# Allegro board usm_rev_p1.brd
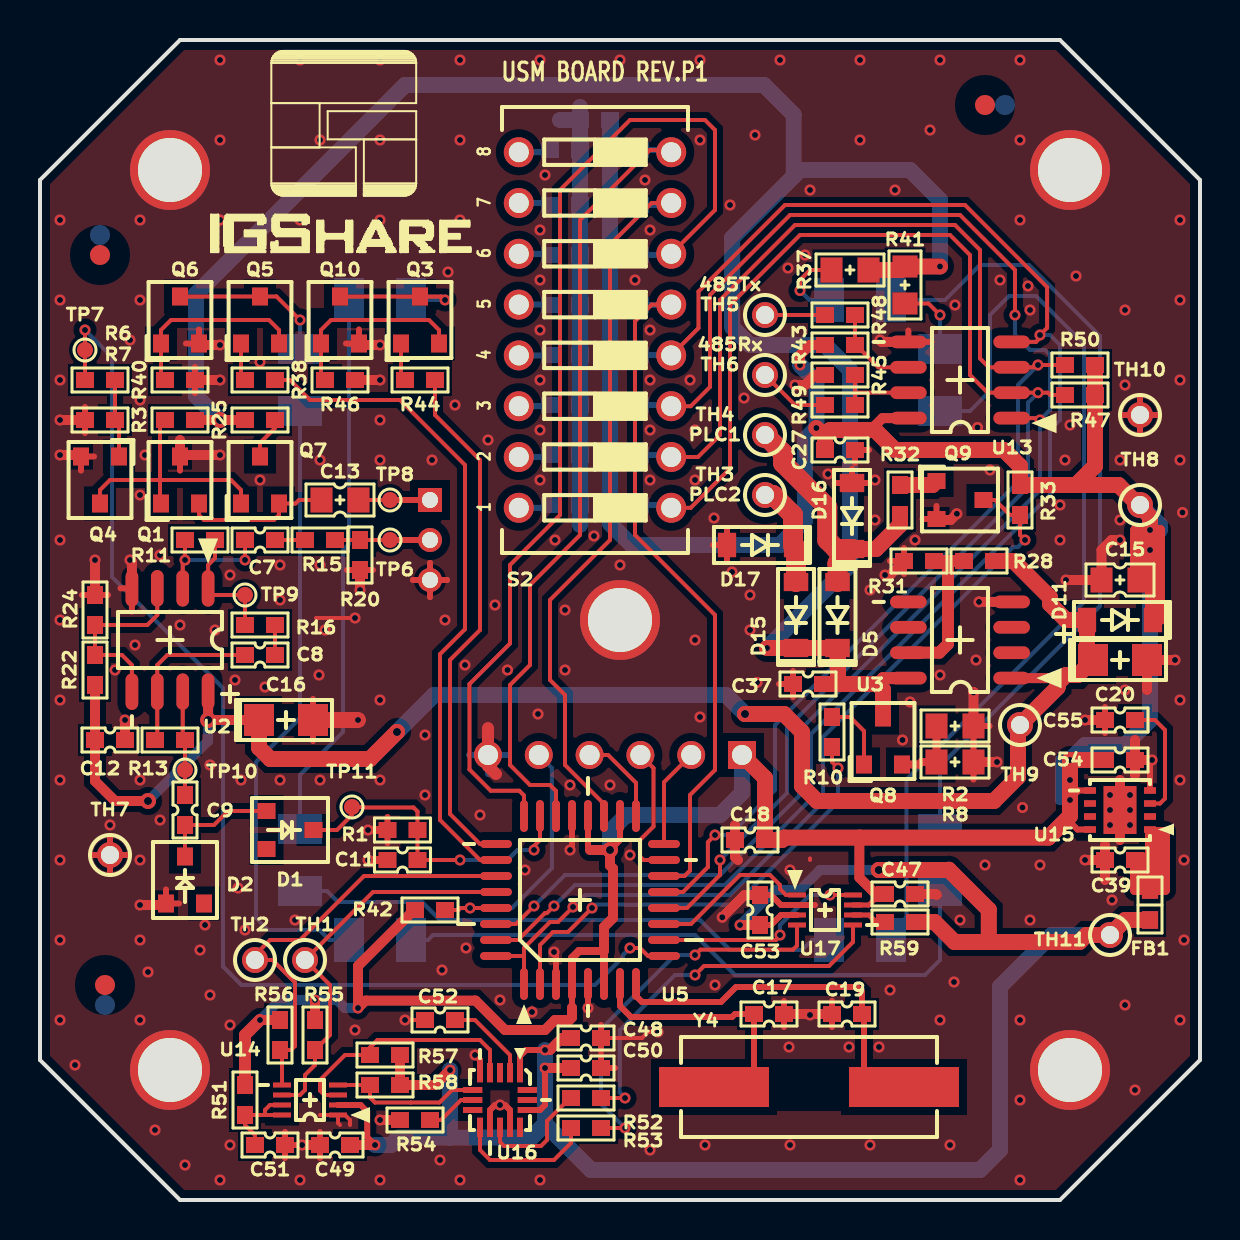
[diagram p0: board, top side]
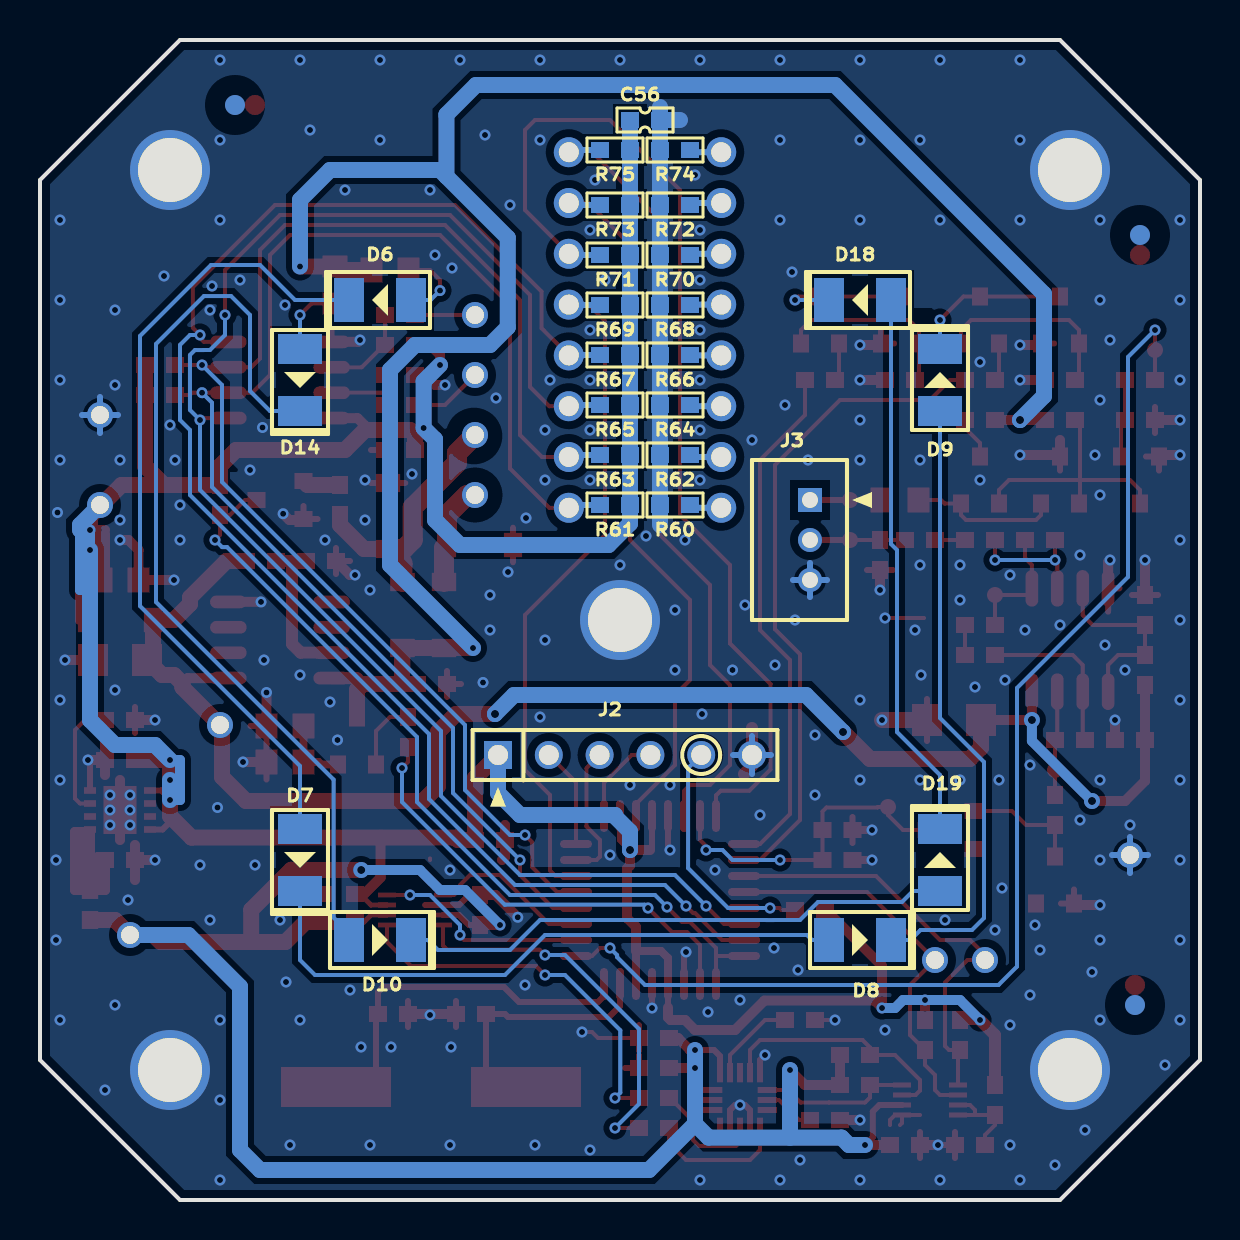
[diagram p1: board, bottom side, seen from below]

Outline 58 x 58 mm; copper layers: TOP, BOTTOM. Coordinates in mm from the lower left corner of the outline.
Outline path: 0,51 7,58 51,58 58,51 58,7 51,0 7,0 0,7 0,51

## Placement (name value [footprint] x y rotation side)
C7  200pF  [CC1608]  11 33 0 top
C8  680pF  [CC1608]  11 27.25 0 top
C9  1nF  [CC1608]  7.25 19.5 90 top
C11  560pF  [CC1608]  18.12 17 0 top
C12  100nF  [CC1608]  3.5 23 180 top
C13  47nF  [CC2012]  15 35 180 top
C15  2.2uF  [CC2012]  54 31 0 top
C16  TCSCS1C685MAAR  [TC3216]  12.3 24 0 top
C17  15pF  [CC1608]  36.45 9.3 0 top
C18  100nF  [CC1608]  35.5 18 0 top
C19  15pF  [CC1608]  40.35 9.3 180 top
C20  TCSCS1C685MAAR  [TC3216]  54 27 0 top
C27  100nF  [CC1608]  40 37.5 180 top
C37  680nF  [CC1608]  38.4 25.8 0 top
C39  2.2uF  [CC1608]  54 17 180 top
C47  100nF  [CC1608]  43 15.3 0 top
C48  100nF  [CC1608]  27.3 8.1 0 top
C49  100nF  [CC1608]  14.75 2.75 180 top
C50  4.7uF  [CC1608]  27.3 6.6 0 top
C51  2.2uF  [CC1608]  11.5 2.75 0 top
C52  100nF  [CC1608]  20 9 180 top
C53  100nF  [CC1608]  36 14.5 90 top
C54  100nF  [CC1608]  54 22 0 top
C55  100nF  [CC1608]  54 24 180 top
C56  100nF  [CC1608]  27.75 54 0 bottom
D1  -  [BAT54]  12.5 18.5 270 top
D2  -  [BAT54]  7.25 16 0 top
D5  MMSD4148T1G  [SOD-123]  39.88 29.25 270 top
D6  JSL_3528URC  [JSL-3528_ALT]  41 45 0 bottom
D7  JSL_3528URC  [JSL-3528_ALT]  45 17 270 bottom
D8  JSL_3528URC  [JSL-3528_ALT]  17 13 180 bottom
D9  JSL_3528URC  [JSL-3528_ALT]  13 41 90 bottom
D10  JSL_3528PGC  [JSL-3528_ALT]  41 13 180 bottom
D11  MMSD4148T1G  [SOD-123]  54 29 0 top
D14  JSL_3528PGC  [JSL-3528_ALT]  45 41 270 bottom
D15  MMSD4148T1G  [SOD-123]  37.8 29.25 270 top
D16  MMSD4148T1G  [SOD-123]  40.6 34.2 270 top
D17  MMSD4148T1G  [SOD-123]  36 32.75 0 top
D18  JSL_3528PGC  [JSL-3528_ALT]  17 45 0 bottom
D19  JSL_3528PGC  [JSL-3528_ALT]  13 17 90 bottom
FB1  BLM18HE152SN1  [BEAD1608]  55.5 14.75 270 top
H1  PCB_HOLE  [HOLE3_2]  6.5 51.5 0 top
H2  PCB_HOLE  [HOLE3_2]  51.5 51.5 0 top
H3  PCB_HOLE  [HOLE3_2]  6.5 6.5 0 top
H4  PCB_HOLE  [HOLE3_2]  51.5 6.5 0 top
H5  PCB_HOLE  [HOLE3_2]  29 29 0 top
J2  PH01(2.54)-SS40P-11.5MM  [HEADER6_2_5MM_S]  28.75 22.25 180 bottom
J3  -  [A2001-WV03]  19.5 33 90 bottom
NOREF  -  []  0 7 0 top
NOREF#2  -  []  72 -25.8 0 top
NOREF#3  -  []  7 0 90 top
NOREF#4  -  [unnamed#2]  47.25 54.75 0 top
NOREF#5  -  []  0 0 0 top
NOREF#6  -  [unnamed#2]  3 47.25 0 top
NOREF#7  -  []  80.6 -2.2 0 top
NOREF#8  -  [unnamed#2]  3.25 10.75 0 top
NOREF#9  -  [unnamed#2]  3 48.25 180 bottom
NOREF#10  -  [unnamed#2]  3.25 9.75 180 bottom
NOREF#11  -  [unnamed#2]  48.25 54.75 180 bottom
Q1  MMBT3906  [SOT23]  7 36 0 top
Q3  MMBT3904  [SOT23]  19 44 0 top
Q4  MMBT3904  [SOT23]  3 36 180 top
Q5  MMBT3904  [SOT23]  11 44 0 top
Q6  MMBT3904  [SOT23]  7 44 0 top
Q7  MMBT3904  [SOT23]  11 36 0 top
Q8  ZXTN04120HFF_SOT23F  [SOT23]  42.15 22.95 0 top
Q9  MMBT3904  [SOT23]  46 35 270 top
Q10  MMBT3904  [SOT23]  15 44 0 top
R1  510K  [RC1608]  18.12 18.5 0 top
R2  15  [RC2012]  45.75 23.7 180 top
R3  47K  [RC1608]  7 39 0 top
R6  10K  [RC1608]  3 41 0 top
R7  10K  [RC1608]  3 39 0 top
R8  15  [RC2012]  45.75 21.9 180 top
R10  1K  [RC1608]  39.6 23.4 270 top
R11  1M  [RC1608]  8 33 0 top
R13  1M  [RC1608]  6.5 23 0 top
R15  10K  [RC1608]  14 33 180 top
R16  10K  [RC1608]  11 28.75 0 top
R20  100K  [RC1608]  16 32.25 90 top
R22  10K  [RC1608]  2.75 26.5 90 top
R24  10K  [RC1608]  2.75 29.5 270 top
R25  200  [RC1608]  11 39 180 top
R28  360K  [RC1608]  46.95 31.95 0 top
R31  100K  [RC1608]  43.95 31.95 0 top
R32  100K  [RC1608]  43 35 90 top
R33  47K  [RC1608]  49 35 90 top
R37  1K  [RC2012]  40.5 46.5 0 top
R38  2.7K  [RC1608]  11 41 180 top
R40  3K  [RC1608]  7 41 180 top
R41  1K  [RC2012]  43.25 45.75 90 top
R42  10K  [RC1608]  19.5 14.5 180 top
R43  4.7K  [RC1608]  40 42.75 180 top
R44  2.7K  [RC1608]  19 41 180 top
R45  4.7K  [RC1608]  40 41.25 0 top
R46  3K  [RC1608]  15 41 180 top
R47  4.7K  [RC1608]  52 40.25 0 top
R48  10  [RC1608]  40 44.25 0 top
R49  10  [RC1608]  40 39.75 0 top
R50  4.7K  [RC1608]  52 41.75 0 top
R51  200K  [RC1608]  10.25 5 90 top
R52  0  [RC1608]  27.3 5.1 180 top
R53  0  [RC1608]  27.3 3.6 180 top
R54  4.7K  [RC1608]  18.75 4 0 top
R55  4.7K  [RC1608]  13.75 8.25 90 top
R56  4.7K  [RC1608]  12 8.25 90 top
R57  4.7K  [RC1608]  17.25 7.25 0 top
R58  4.7K  [RC1608]  17.25 5.75 0 top
R59  4.7K  [RC1608]  43 13.9 0 top
R60  1K  [RC1608]  26.25 34.75 180 bottom
R61  4.7K  [RC1608]  29.25 34.75 180 bottom
R62  1K  [RC1608]  26.25 37.25 180 bottom
R63  4.7K  [RC1608]  29.25 37.25 180 bottom
R64  1K  [RC1608]  26.25 39.75 180 bottom
R65  4.7K  [RC1608]  29.25 39.75 180 bottom
R66  1K  [RC1608]  26.25 42.25 180 bottom
R67  4.7K  [RC1608]  29.25 42.25 180 bottom
R68  1K  [RC1608]  26.25 44.75 180 bottom
R69  4.7K  [RC1608]  29.25 44.75 180 bottom
R70  1K  [RC1608]  26.25 47.25 180 bottom
R71  4.7K  [RC1608]  29.25 47.25 180 bottom
R72  1K  [RC1608]  26.25 49.75 180 bottom
R73  4.7K  [RC1608]  29.25 49.75 180 bottom
R74  1K  [RC1608]  26.25 52.5 180 bottom
R75  4.7K  [RC1608]  29.25 52.5 180 bottom
S2  -  [LL1051-1-8]  27.75 43.5 90 top
TH1  TH  [1PIN-HDR]  13.25 12 0 top
TH2  TH  [1PIN-HDR]  10.75 12 0 top
TH3  TH  [1PIN-HDR]  36.25 35.25 0 top
TH4  TH  [1PIN-HDR]  36.25 38.25 0 top
TH5  TH  [1PIN-HDR]  36.25 44.25 0 top
TH6  TH  [1PIN-HDR]  36.25 41.25 0 top
TH7  GND  [1PIN-HDR]  3.5 17.25 0 top
TH8  D4.9V  [1PIN-HDR]  55 34.75 0 top
TH9  A5.5V  [1PIN-HDR]  49 23.75 0 top
TH10  GND  [1PIN-HDR]  55 39.25 0 top
TH11  D3V3P  [1PIN-HDR]  53.5 13.25 0 top
TP6  B+  [TP]  17.5 33 0 top
TP7  B+  [TP]  2.25 42.5 0 top
TP8  B+  [TP]  17.5 35 0 top
TP9  B+  [TP]  10.25 30.25 0 top
TP10  B+  [TP]  7.25 21.5 0 top
TP11  B+  [TP]  15.6 19.65 0 top
U2  TL072ID  [SOP8_3_9_6_1_27]  6.5 28 180 top
U3  LP2951D  [SOP8_3_9_6_1_27]  46 28 90 top
U5  ATMEGA48V-10AU  [QFP32_7_9_0_8]  27 15 90 top
U13  SN65176BD/DNI  [SOP8_3_9_6_1_27]  46 41 90 top
U14  PCA9306_VSSOP  [TSSOP8_2_3_3_1_0_5]  13.5 5 90 top
U15  TPS73533QDRBRQ1  [QFN8_3_0_65]  54 19.5 90 top
U16  MMA8451Q  [QFN16_3_0_5]  23 5 270 top
U17  TXS0102-Q1  [TSSOP8_2_3_3_1_0_5]  39.25 14.5 270 top
Y4  SX-1(8MHz)  [SX-1]  38.45 5.65 0 top

## Library data of the parts
C7-C9 C11 C12 C17-C19 C27 C37 C39 C47-C56 = _CC1608
C13 C15 = _CC2012
C16 C20 = _TC3216
D1 D2 = _BAT54
D5 D11 D15-D17 = _SOD-123
D6-D10 D14 D18 D19 = _JSL-3528_ALT
FB1 = _BEAD1608
H1-H5 = _HOLE3_2
J2 = _HEADER6_2_5MM_S
J3 = _A2001-WV03
Q1 Q3-Q10 = _SOT23
R1 R3 R6 R7 R10 R11 R13 R15 R16 R20 R22 R24 R25 R28 R31-R33 R38 R40 R42-R75 = _RC1608
R2 R8 R37 R41 = _RC2012
S2 = _LL1051-1-8
TH1-TH11 = _1PIN-HDR
TP6-TP11 = _TP
U2 U3 U13 = _SOP8_3_9_6_1_27
U5 = _QFP32_7_9_0_8
U14 U17 = _TSSOP8_2_3_3_1_0_5
U15 = _QFN8_3_0_65
U16 = _QFN16_3_0_5
Y4 = _SX-1

## Footprints (pads in the part's own frame, mm; a bottom-side part is the same pattern mirrored in y, then rotated)
1PIN-HDR
  round 1.3 hole 0.9: 1(0,0)
A2001-WV03
  rect 1.2x1.2 hole 0.8: 1(2,0)
  round 1.2 hole 0.8: 2(0,0) 3(-2,0)
BAT54
  rect 0.8x0.9 smd: 1(0,1.175) 2(-0.95,-1.175) 3(0.95,-1.175)
BEAD1608
  rect 0.889x0.813 smd: 1(-0.75,0) 2(0.75,0)
CC1608
  rect 0.9x0.8 smd: 1(-0.75,0) 2(0.75,0)
CC2012
  rect 1.1x1.25 smd: 1(-0.925,0) 2(0.925,0)
HEADER6_2_5MM_S
  rect 1.4x1.4 hole 1: 1(-6.35,0)
  round 1.4 hole 1: 2(-3.81,0) 3(-1.27,0) 4(1.27,0) 5(3.81,0) 6(6.35,0)
HOLE3_2
  round 4 hole 3.2: 1(0,0)
JSL-3528_ALT
  rect 1.5x2.2 smd: 1(-1.55,0) 2(1.55,0)
LL1051-1-8
  round 1.499 hole 1: 1(-8.89,3.81) 2(-6.35,3.81) 3(-3.81,3.81) 4(-1.27,3.81) 5(1.27,3.81) 6(3.81,3.81) 7(6.35,3.81) 8(8.89,3.81) 9(8.89,-3.81) 10(6.35,-3.81) 11(3.81,-3.81) 12(1.27,-3.81) 13(-1.27,-3.81) 14(-3.81,-3.81) 15(-6.35,-3.81) 16(-8.89,-3.81)
QFN8_3_0_65
  rect 0.325x0.6 smd: 1(-0.975,-1.5) 2(-0.325,-1.5) 3(0.325,-1.5) 4(0.975,-1.5) 5(0.975,1.5) 6(0.325,1.5) 7(-0.325,1.5) 8(-0.975,1.5)
  rect 2.4x1.65 smd: 9(0,0)
QFN16_3_0_5
  rect 0.967x0.3 smd: 1(-1.367,1) 2(-1.367,0.5) 3(-1.367,0) 4(-1.367,-0.5) 5(-1.367,-1) 9(1.367,-1) 10(1.367,-0.5) 11(1.367,0) 12(1.367,0.5) 13(1.367,1)
  rect 0.3x0.967 smd: 6(-0.5,-1.367) 7(0,-1.367) 8(0.5,-1.367) 14(0.5,1.367) 15(0,1.367) 16(-0.5,1.367)
QFP32_7_9_0_8
  oval 1.6x0.4 smd: 1(-4.2,2.8) 2(-4.2,2) 3(-4.2,1.2) 4(-4.2,0.4) 5(-4.2,-0.4) 6(-4.2,-1.2) 7(-4.2,-2) 8(-4.2,-2.8) 17(4.2,-2.8) 18(4.2,-2) 19(4.2,-1.2) 20(4.2,-0.4) 21(4.2,0.4) 22(4.2,1.2) 23(4.2,2) 24(4.2,2.8)
  oval 0.4x1.6 smd: 9(-2.8,-4.2) 10(-2,-4.2) 11(-1.2,-4.2) 12(-0.4,-4.2) 13(0.4,-4.2) 14(1.2,-4.2) 15(2,-4.2) 16(2.8,-4.2) 25(2.8,4.2) 26(2,4.2) 27(1.2,4.2) 28(0.4,4.2) 29(-0.4,4.2) 30(-1.2,4.2) 31(-2,4.2) 32(-2.8,4.2)
RC1608
  rect 0.9x0.8 smd: 1(-0.75,0) 2(0.75,0)
RC2012
  rect 1.1x1.25 smd: 1(-0.925,0) 2(0.925,0)
SOD-123
  rect 0.91x1.22 smd: 1(1.65,0) 2(-1.65,0)
SOP8_3_9_6_1_27
  oval 0.635x1.829 smd: 1(-1.905,-2.583) 2(-0.635,-2.583) 3(0.635,-2.583) 4(1.905,-2.583) 5(1.905,2.583) 6(0.635,2.583) 7(-0.635,2.583) 8(-1.905,2.583)
SOT23
  rect 0.8x0.9 smd: 1(-0.95,-1.175) 2(0.95,-1.175) 3(0,1.175)
SX-1
  rect 5.5x2 smd: 1(-4.75,0) 2(4.75,0)
TC3216
  rect 1.5x1.6 smd: 1(-1.35,0) 2(1.35,0)
TP
  round 0.8 smd: 1(0,0)
TSSOP8_2_3_3_1_0_5
  rect 0.25x0.9 smd: 1(-0.75,-1.4) 2(-0.25,-1.4) 3(0.25,-1.4) 4(0.75,-1.4) 5(0.75,1.4) 6(0.25,1.4) 7(-0.25,1.4) 8(-0.75,1.4)
unnamed#2
  round 1 smd: (0,0)

## Nets
A5.5V: C12.2 C16.1 C20.1 D11.2 R22.1 R28.2 TH9.1 U2.8 U3.1
A24V: C37.2 D5.1 D15.1 Q8.3 R3.2 R25.2 R37.2 R41.2 U3.8
D3V3P: C48.1 C49.1 C50.1 C53.1 FB1.2 R57.2 R58.2 R59.2 TH11.1 U14.2 U16.1 U16.14 U17.3
D4.9V: C15.2 C18.2 C27.2 C47.1 C54.1 C56.2 D11.1 J2.1 R33.2 R42.2 R43.2 R47.2 R50.2 R51.2 R55.2 R56.2 R61.2 R63.2 R65.2 R67.2 R69.2 R71.2 R73.2 R75.2 TH8.1 U5.4 U5.6 U5.18 U5.20 U13.8 U15.5 U15.8 U17.7
GND: C11.1 C12.1 C15.1 C16.2 C17.2 C18.1 C19.2 C20.2 C27.1 C37.1 C39.2 C47.2 C48.2 C49.2 C50.2 C51.2 C52.2 C53.2 C54.2 C55.2 C56.1 D2.2 D16.2 D17.2 H1.1 H2.1 H3.1 H4.1 H5.1 J2.6 J3.3 Q1.3 Q4.2 Q6.2 Q9.2 Q10.2 R1.1 R2.1 R7.1 R8.1 R20.1 R24.1 R31.1 R40.1 R45.1 R46.1 R54.1 R60.1 R62.1 R64.1 R66.1 R68.1 R70.1 R72.1 R74.1 TH7.1 TH10.1 U2.4 U3.4 U5.3 U5.5 U5.21 U13.5 U14.1 U15.4 U15.9 U16.5 U16.10 U16.12 U17.2
485_DE_EN: R50.1 R63.1 S2.15 U5.13 U13.3
485_RE_EN: R47.1 R61.1 S2.16 U5.12 U13.2
485_RX: R49.1 TH6.1
485_RXD: R65.1 S2.14 U5.30 U13.1
485_TX: R48.1 TH5.1
485_TXD: R67.1 S2.13 U5.31 U13.4
I2C_SCL: R55.1 TH1.1 U5.28 U14.6
I2C_SDA: R56.1 TH2.1 U5.27 U14.5
INT1: R52.1 U17.5
INT1_M: U5.10 U17.8
INT2: R53.1 U17.4
INT2_M: U5.11 U17.1
LED_GREEN: R44.1 U5.25
LED_RED: R38.1 U5.26
PLC1: D5.2 D16.1 R32.1 TH4.1
PLC2: D15.2 D17.1 TH3.1
PLC_RX: Q9.3 R33.1 U5.1 U5.32
PLC_TX: R10.2 U5.2
RESET: J2.5 R42.1 U5.29
RX_ADC: C11.2 D1.1 R1.2 TP11.1 U5.23
RX_IN: J3.2 R15.1 R20.2 TP6.1
SCL: R57.1 U14.3 U16.4
SDA: R58.1 U14.4 U16.6
SELECT: R75.1 S2.9 U5.22
TX_OUT: C13.1 J3.1 TP8.1
TX_TRIG: R6.1 TP7.1 U5.9
USM_ID4: R69.1 S2.12 U5.14
USM_ID5: R71.1 S2.11 U5.24
USM_ID6: R73.1 S2.10 U5.19
N00306: C55.1 U15.3
N00430: Q8.1 R10.1
N00485: Q8.2 R2.2 R8.2
N00560: C39.1 FB1.1 U15.1
N00808: C51.1 R51.1 U14.7 U14.8
N00882: R28.1 R31.2 U3.7
N16711905: Q9.1 R32.2
N16712688: R43.1 R48.2 U13.6
N16712703: R45.2 R49.2 U13.7
N16713814: J2.4 U5.17
N16714029: J2.3 U5.15
N16714271: C19.1 U5.8 Y4.2
N16714295: C17.1 U5.7 Y4.1
N16714845: J2.2 U5.16
N16717763: R54.2 U16.7
N16718046: R53.2 U16.9
N16718070: R52.2 U16.11
N16718282: C52.1 U16.2
N16724355: R59.1 U17.6
N16729656: R60.2 S2.1
N16729712: R62.2 S2.2
N16729754: R64.2 S2.3
N16729796: R66.2 S2.4
N16732309: R68.2 S2.5
N16732331: R70.2 S2.6
N16732335: R72.2 S2.7
N16732375: R74.2 S2.8
N16777693: Q4.1 R6.2 R7.2
N16777717: Q1.1 Q4.3 Q7.1 R3.1
N16777760: C13.2 Q1.2 Q7.2
N16777979: C7.2 R15.2
N16777981: C7.1 R11.1 U2.2
N16778000: R22.2 R24.2 U2.3 U2.5
N16778063: C8.1 R13.1 U2.6
N16778096: R11.2 R16.1 TP9.1 U2.1
N16778098: C8.2 R16.2
N16778104: C9.2 R13.2 TP10.1 U2.7
N16778216: C9.1 D1.2 D2.1
N16779077: D9.2 Q5.3 Q6.3
N16779095: Q5.2 Q6.1 R40.2
N16779267: Q5.1 R38.2
N16779649: D18.2 Q3.3 Q10.3
N16779651: Q3.2 Q10.1 R46.2
N16779692: Q3.1 R44.2
N16779821: D14.1 R41.1
N16779835: D10.1 D14.2
N16779837: D10.2 D19.1
N16779852: D18.1 D19.2
N16779961: D6.1 R37.1
N16779980: D6.2 D7.1
N16779982: D7.2 D8.1
N16779984: D8.2 D9.1
N167777270: Q7.3 R25.1

Pads without a net: D1 3; D2 3; U3 2 3 5 6; U15 2 6 7; U16 3 8 13 15 16

## Via types
v1: diameter 0.55, hole 0.3, TOP to BOTTOM, 297 vias
v2: diameter 0.8, hole 0.4, TOP to BOTTOM, 7 vias

## Routing (per net, layer and track width the routed paths; a pad name or vN(x,y) marks a point on that pad's centre or on a via; arc(x,y) is an arc through that point)
A5.5V: length 80.6
  TOP w0.5: U3.1 50.61,26.09 50.88,25.83 ; C16.1 v2(8.4,24) U2.8 ; R22.1 C12.2 2.75,20.95 3.75,19.95 v2(5.4,19.95)
  TOP w0.8: R28.2 48.68,31.95 50.5,30.13 50.5,29.8 51.3,29 D11.2 52.35,27.3 C20.1 51.9,26.25 51.3,26.25 50.88,25.83 50.88,25.63 TH9.1 48.9,23.65 48.9,21.15 47.7,19.95 38.85,19.95 38.1,20.7 38.1,23.4 37.2,24.3 v2(35.25,24.3) ; v2(17.85,23.4) 16.5,22.05 11.52,22.05 10.95,22.62 C16.1
  BOTTOM w0.5: v2(5.4,19.95) 8.4,22.95 v2(8.4,24)
  BOTTOM w0.8: v2(17.85,23.4) 19.7,25.25 34.3,25.25 v2(35.25,24.3)
A24V: length 105.9
  TOP w0.5: R3.2 v2(9,39) R25.2
  TOP w0.6: U3.8 42.15,26.09 41.86,25.8
  TOP w0.8: 39.9,25.8 41.86,25.8 42.15,25.51 Q8.3 ; 39.9,25.8 C37.2 ; 39.9,25.8 39.9,27.57 D5.1 ; 39.88,26.67 D5.1 ; D5.1 D15.1 v1(36.35,27.6) ; v1(45,46.67) R41.2 43.08,46.5 R37.2
  BOTTOM w0.8: 37.68,51.18 37.68,54.27 36.2,55.75 18.25,55.75 7.8,45.3 7.8,40.2 v2(9,39) ; 37.68,51.18 34.61,48.11 34.61,43.64 35.5,42.75 39.25,42.75 40.5,41.5 40.5,31.75 v1(36.35,27.6) ; 37.68,51.18 38,51.5 43.5,51.5 45,50 v1(45,46.67)
D3V3P: length 103.5
  TOP w0.3: v1(25.25,6.6) 25.25,4.75 25,4.5 U16.14 ; U17.3 37.05,14.25 36.55,13.75 C53.1 ; v1(16.75,2.75) 16.36,3.14 16.36,4.42 16.03,4.75 U14.2 ; v1(25.25,7.5) 24.3,7.5 24,7.2 U16.1
  TOP w0.5: v1(25.25,7.5) 25.5,7.5 26.1,8.1 C48.1 ; v1(20.5,6.5) 19.75,5.75 R58.2 R57.2 ; C50.1 v1(25.25,6.6) ; v1(35,13.75) C53.1 ; v1(16.75,2.75) C49.1
  TOP w0.8: v2(41.94,16.5) 45.43,16.5 45.44,16.51 47.44,14.51 47.44,12.9 ; R59.2 44.73,13.9 45.73,12.9 47.44,12.9 ; 47.44,12.9 51.97,12.9 52.32,13.25 TH11.1 54.25,14 FB1.2
  BOTTOM w0.5: v2(41.94,16.5) 39,16.5 38,15.5 36.75,15.5 v1(35,13.75)
  BOTTOM w0.8: v1(16.75,2.75) 17.55,2.75 17.92,3.12 20.5,3.12 ; v1(25.25,7.5) v1(25.25,6.6) 25.25,3.8 ; 20.5,3.12 24.57,3.12 25.25,3.8 ; 20.5,3.12 v1(20.5,6.5) ; 25.25,3.8 27.55,1.5 47,1.5 48,2.5 48,10.67 50.58,13.25 TH11.1
D4.9V: length 198.4
  TOP w0.25: U17.7 41.45,14.75 42,15.3
  TOP w0.3: v2(28.5,17.5) 29,18 U5.18 ; U15.8 51.88,18.52 51.5,18.9 51.5,19.2 ; U15.5 51.92,20.48 51.5,20.05 ; 26.6,9.62 U5.4 ; 27.5,17.5 27.4,17.6 U5.20
  TOP w0.4: U5.4 26.6,12.1 26.95,12.45 28.2,12.45 U5.6
  TOP w0.5: R56.2 v1(11,9) ; v1(38,41.75) 38,42.25 38.5,42.75 R43.2 ; v1(55.5,33.5) v1(55.5,32.5) 55.5,31 ; v1(55.5,33.5) 56,33.5 56,29 D11.1 55.5,29 55.5,31 ; v1(55.5,33.5) 54.75,33.5 ; R42.2 18.7,14.5 15.9,11.7 v1(15.9,9.6) 16.27,9.97 21.78,9.97 23.25,8.5 25.25,8.5 25.75,9 26.47,9 26.6,9.13 26.6,9.62 ; 55.5,31 55,31 ; U13.8 42.13,39.09 41.75,38.72 41.75,38.5 ; 40.97,18.12 40.97,16.12 41.79,15.3 C47.1 ; 54.75,33.3 54.75,31 C15.2 55,31 ; 28.2,12.45 28.2,13.65 28.65,14.1 28.65,16.57 28.5,16.72 v2(28.5,17.5) 27.5,17.5 ; 55,33 55,31 ; R55.2 v1(13.75,10)
  TOP w0.6: R51.2 10.25,8.25 v1(11,9)
  TOP w0.8: 51.8,35.75 52.75,36.7 R47.2 R50.2 ; 51.8,35.75 53.92,35.75 55.5,34.17 v1(55.5,33.5) ; 51.8,35.75 R33.2 49,36.7 48.2,37.5 42.75,37.5 41.75,38.5 39.5,38.5 39.25,38.25 39.25,38.17 ; 39.25,38.17 v1(38.82,38.6) ; 39.25,38.17 C27.2 ; J2.1 36.25,21.1 C18.2 37.1,18 37.22,18.12 50.42,18.12 51.5,19.2 v1(51.5,20) ; C54.1 v1(51.5,22) v1(51.5,21) 51.5,20.05 ; 55,33.05 55,33
  BOTTOM w0.5: v1(51.5,22) 51,22 51,20 v1(51.5,20) ; v1(55.5,32.5) v1(55.5,33.5) 56,33.5 56,30.5 55.5,30.5 ; v1(11,9) 12,10 v1(13.75,10) 14.85,10 15.25,9.6 v1(15.9,9.6)
  BOTTOM w0.8: v1(51.5,20) v1(51.5,21) ; C56.2 R75.2 R73.2 R71.2 R69.2 R67.2 R65.2 R63.2 R61.2 28.5,33.82 29.57,32.75 37,32.75 38.25,34 38.25,38.03 v1(38.82,38.6) 38.82,40.93 v1(38,41.75) ; TH8.1 56,33.75 56,33.5 ; v2(28.5,17.5) 28.5,18.43 29.25,19.18 29.25,19.25 34,19.25 35.1,20.35 J2.1 ; v1(55.5,32.5) 55.5,24 54.25,22.75 52.25,22.75 v1(51.5,22)
GND: length 177.9
  TOP w0.2: 13.8,29.1 v1(15.75,29.1) ; 15,3.75 14.9,3.85 U14.1 ; 38.5,17.08 38.5,17 ; C52.2 v1(18.25,9) ; v1(30.9,8.4) 30.4,8.4 30.1,8.1 C48.2 ; U14.1 14,4.25 ; U14.1 15.25,4.25 15.5,4 15.5,3.75
  TOP w0.3: Q6.2 7.95,43.53 ; Q6.2 7.3,42.83 ; Q6.2 8.6,42.83 ; J3.3 20.35,31 ; J3.3 19.5,31.85 ; J3.3 18.65,31 ; J3.3 19.5,30.15 ; 2.6,17.25 TH7.1 ; TH7.1 3.5,16.35 ; TH7.1 3.5,18.15 ; TH7.1 4.4,17.25 ; C37.1 37.65,26.45 ; C37.1 37.65,25.15 ; C37.1 36.95,25.8 ; 44.12,34.05 Q9.2 ; Q9.2 45.53,34.05 ; Q9.2 44.83,34.7 ; C51.2 12.95,2.75 ; C51.2 12.25,3.4 ; C51.2 12.25,2.1 ; U16.5 22,7 v1(21.75,7.25) ; 15.3,42.83 Q10.2 ; Q10.2 16.6,42.83 ; Q10.2 15.95,43.53 ; 39.74,35.85 D16.2 ; D16.2 40.6,36.56 ; D16.2 41.46,35.85 ; 28.05,8.75 C48.2 28.05,7.45 ; 7,36.47 Q1.3 7.65,37.17 ; 43.42,43.47 U13.5 44.58,42.91 ; 2.05,36.47 Q4.2 ; Q4.2 1.4,37.17 ; Q4.2 2.7,37.17 ; 13.65,22.95 C16.2 13.65,25.05 ; U5.21 26.6,17.6 v1(26.5,17.5) ; D2.2 6.3,15.53 ; D2.2 6.95,14.82 ; D2.2 5.65,14.82 ; 38.75,14.75 U17.2 37.05,14.75 36.55,15.25 C53.2 ; U5.3 25.8,12.2 25.7,12.3 v1(25.7,12.4) ; 14,3.4 C49.2 14,2.1 ; 3.4,30.25 R24.1 2.1,30.25 ; 53.25,23.35 C55.2 53.25,24.65 ; 15.35,31.5 R20.1 16.65,31.5 ; 46.67,21.02 R8.1 46.67,22.78 ; 39.6,8.65 C19.2 39.6,9.95 ; 4.59,29.42 U2.4 4.03,30.58 ; R31.1 43.2,32.6 ; R31.1 43.2,31.3 ; R31.1 42.5,31.95 ; 28.75,6.6 C50.2 28.05,7.25 ; 40.75,36.85 C27.1 41.45,37.5 ; TH10.1 55,40.15 ; TH10.1 54.1,39.25 ; TH10.1 55.9,39.25 ; TH10.1 55,38.35 ; 17.38,17.85 R1.1 17.38,19.15 ; U5.5 v1(27.4,9.6) ; 2.25,39.65 R7.1 2.25,38.35 ; 33.64,32.75 D17.2 ; D17.2 34.35,33.61 ; D17.2 34.35,31.89 ; 7.75,41.65 R40.1 7.75,40.35 ; U16.10 22.5,4.5 22.75,4.75 v1(23,4.75) 23.25,4.75 23.5,4.5 U16.12 ; 37.2,9.95 C17.2 37.2,8.65 ; 55.5,22 U15.4 ; 46.67,22.82 R2.1 47.48,23.7
  TOP w0.4: R1.1 v1(16.4,18.5) ; C11.1 v1(16.4,17)
  TOP w0.5: v1(46.95,29.91) U3.4 ; 54,18.75 v1(53.5,18.75) ; 54,18.75 v1(54.5,18.75) ; 54,18.75 54,18 ; 54,18.75 U15.9 ; R7.1 v1(1,39) ; 55.35,25.5 C20.2 v1(56.75,27) ; v1(54,33) 53.58,33 53.08,32.5 C15.1 v1(51.3,31) ; 7,38 7,37.25 ; 7,37.25 Q1.3 ; 7,37.25 v1(9,37.25) ; R45.1 38.75,41.25 38.25,40.75 v1(37.75,40.75) ; R54.1 v1(17,4) ; U13.5 42.09,42.91 v1(42,43) ; Q6.2 7.95,42.75 v1(9,42.75) ; v1(9,41) R40.1 ; R46.1 v1(17,41) ; Q4.2 2.05,37.25 v1(1,37.25) ; 54,20.25 U15.9 ; 54,20.25 v1(53.5,20.25) ; 54,20.25 54,21 ; 54,20.25 v1(54.5,20.25) ; U15.9 v1(54.5,19.5) ; U15.9 v1(53.5,19.5) ; v1(13.1,2.75) C49.2 ; C39.2 v1(52.25,17) ; C39.2 53.25,16 ; C39.2 53.25,17.75 ; R24.1 v1(2.75,32) ; 34.9,17 34.75,17.15 C18.1 34.75,18.75 ; C54.2 54.75,23 ; C54.2 v1(55.6,22) ; C54.2 54.75,21.25 ; v1(5,14.75) 6.3,14.75 D2.2 ; v1(4.5,32) 4.59,31.91 U2.4 ; v1(17,42.75) 15.95,42.75 Q10.2 ; C12.1 v1(4.25,24) ; v1(34.11,14.14) 35.23,15.25 C53.2 ; R31.1 42.5,31.25 v1(42.25,31.25) ; v1(45.84,34.31) 45.53,34 44.83,34 Q9.2 ; v1(16,30.5) R20.1 ; R2.1 v1(46.67,25.38) ; C55.2 v1(52.25,24) ; C17.2 38.45,9.3 v1(38.5,9.25) 38.55,9.3 C19.2 ; C47.2 44.79,15.3 44.84,15.25 ; R8.1 v1(47.85,21.9)
  TOP w0.6: 22.4,23.6 J2.6 22.4,21.7 22.8,21.3
  TOP w0.8: C16.2 v1(15.9,24)
  BOTTOM w0.3: TH10.1 55.9,39.25 ; TH10.1 54.1,39.25 ; TH10.1 55,38.35 ; TH10.1 55,40.15 ; 22.4,21.3 J2.6 ; J2.6 23.35,22.25 ; J2.6 22.4,23.2 ; J2.6 21.45,22.25 ; 3.5,16.35 TH7.1 ; TH7.1 4.4,17.25 ; TH7.1 3.5,18.15 ; TH7.1 2.6,17.25 ; J3.3 20.35,31 ; J3.3 19.5,30.15 ; J3.3 19.5,31.85 ; J3.3 18.65,31
  BOTTOM w0.8: 26,54 C56.1 ; C56.1 27,54.65 ; C56.1 R74.1 R72.1 R70.1 R68.1 R66.1 R64.1 R62.1 R60.1 27,33.75
  vias: v1(1,49) v1(1,45) v1(1,41) v1(1,33) v1(1,29) v1(1,25) v1(1,21) v1(1,17) v1(1,13) v1(1,9) v1(1.75,6.75) v1(3.5,18.75) v1(3.75,26.5) v1(4.5,43) v1(4.75,27.75) v1(5,49) v1(5,45) v1(5,40) v1(5,35.25) v1(5,21) v1(5,17) v1(5,13) v1(5,9) v1(5.25,37.25) v1(5.4,11.4) v1(5.75,3.5) v1(6,32.25) v1(6,19) v1(7,28.75) v1(7.25,1.75) v1(8,12.5) v1(8.25,13.75) v1(8.5,21.75) v1(8.5,10.25) v1(8.75,28.5) v1(9,57) v1(9,53) v1(9,49) v1(9,1) v1(9.5,31.25) v1(9.5,8.75) v1(9.5,2.75) v1(9.75,26) v1(9.9,15.6) v1(10.05,21) v1(10.25,13.5) v1(11,41.9) v1(11,36) v1(11.25,25.65) v1(12,31.75) v1(12,30) v1(12,21) v1(12.75,14) v1(13,57) v1(13,49) v1(13,1) v1(13.95,26.25) v1(14,53) v1(14,37) v1(14,31.75) v1(14,21) v1(14.25,28.5) v1(15.75,8.5) v1(17,57) v1(17,53) v1(17,49) v1(17,39) v1(17,37) v1(17,25) v1(17,21) v1(17,1) v1(19.25,23.25) v1(19.25,20.25) v1(19.6,37) v1(20,2) v1(20.1,11.5) v1(20.25,29) v1(20.4,46.4) v1(20.75,39.75) v1(21,57) v1(21,53) v1(21,49) v1(21,1) v1(21.25,26.75) v1(21.3,12.6) v1(22,19.25) v1(22.4,38) v1(22.75,29.75) v1(23,10) v1(23.38,26.5) v1(24.25,16.5) v1(24.6,9.4) v1(24.9,24.3) v1(25,57) v1(25,48.5) v1(25,46) v1(25,43.5) v1(25,41) v1(25,38.5) v1(25,36) v1(25,1) v1(25.25,51.25) v1(25.75,33) v1(26.25,29.5) v1(26.25,26.5) v1(26.5,20.75) v1(27.7,33.2) v1(28.5,20.75) v1(29,57) v1(29,31.75) v1(29.5,17.25) v1(29.75,46) v1(30.25,51) v1(30.5,48.5) v1(30.5,43.5) v1(30.5,41) v1(30.5,38.5) v1(30.5,36) v1(30.5,2.5) v1(32.5,41) v1(32.75,38.5) v1(32.75,36) v1(32.75,28) v1(33,57) v1(33,53) v1(33,24.15) v1(33.25,2.75) v1(33.7,34.1) v1(33.75,10.75) v1(34.5,49.75) v1(34.6,31.4) v1(35.2,40.1) v1(35.5,30.25) v1(35.5,28.5) v1(35.75,53.25) v1(35.85,25.88) v1(37,57) v1(37.4,46.6) v1(37.5,16.5) v1(37.45,7.65) v1(37.5,2.75) v1(38.25,47.25) v1(38.5,50.5) v1(39.4,36.3) v1(40.45,7.65) v1(41,57) v1(41,53) v1(41.5,30.5) v1(41.5,2.75) v1(41.75,36) v1(41.75,34) v1(41.95,7.65) v1(42.5,10.5) v1(42.75,50.5) v1(43.12,23) v1(43.5,24.9) v1(43.75,33) v1(44.5,53.5) v1(45,57) v1(45,26.25) v1(45,9) v1(45.5,2.75) v1(45.7,10.9) v1(45.75,44.75) v1(46,14) v1(46.8,27) v1(46.88,38.62) v1(47.25,16.75) v1(47.5,36.5) v1(48,46) v1(49,57) v1(49,53) v1(49,49) v1(49,9) v1(49,5) v1(49,1) v1(49.12,19.62) v1(49.4,45.7) v1(49.5,44.5) v1(49.5,14) v1(50,16.75) v1(51,34.75) v1(51,33) v1(51.25,37) v1(51.5,38.75) v1(51.8,46.2) v1(53.6,15) v1(54,37) v1(54,34) v1(54.25,44.5) v1(54.25,40.75) v1(54.25,25.5) v1(54.25,9.75) v1(54.75,5.5) v1(57,49) v1(57,45) v1(57,41) v1(57,37) v1(57,25) v1(57,21) v1(57,9) v1(57.12,34.38) v1(57.2,17) v1(57.2,13)
485_DE_EN: length 71.3
  TOP w0.2: R50.1 v1(49.9,41.75) 49.75,41.75 49.63,41.63 U13.3 47.44,41.63 47,42.08 47,47.5 45.75,48.75 37.75,48.75 34,45 34,38.25 32.9,37.15 S2.15 ; U5.13 32.15,15.4 33.4,16.64 33.4,17.89 v1(33.75,18.25)
  BOTTOM w0.2: v1(49.9,41.75) 48.9,40.75 48.9,35.9 36.75,23.75 36.75,20.5 34.5,18.25 v1(33.75,18.25)
  BOTTOM w0.3: R63.1 31.46,37.25 S2.15
485_RE_EN: length 72.8
  TOP w0.2: v1(34,17) 34,16.25 32.35,14.6 U5.12 ; S2.16 32.54,34.61 34.5,36.57 34.5,44.75 38,48.25 45.5,48.25 46.5,47.25 46.5,41.25 47.38,40.37 U13.2 v1(49.9,40.37) 50.4,40.37 50.52,40.25 R47.1
  BOTTOM w0.2: v1(34,17) 37.35,20.35 37.35,23.6 49.4,35.65 49.4,39.87 v1(49.9,40.37)
  BOTTOM w0.3: S2.16 31.42,34.75 R61.1
485_RX: length 3.6
  TOP w0.2: TH6.1 37.75,39.75 R49.1
485_RXD: length 78.5
  TOP w0.2: U5.30 23.8,13.8 v1(24.7,14.7) ; U13.1 50,39.09 v1(50,39) ; S2.14 32.54,39.69 33.5,40.65 33.5,45.25 37.5,49.25 46,49.25 48.75,46.5 v1(48.75,44.25)
  BOTTOM w0.2: v1(24.7,14.7) 26.25,16.25 34,16.25 37.95,20.2 37.95,23.45 50,35.5 v1(50,39) 50.5,39.5 50.5,42.25 50.25,42.5 49.79,42.5 49.79,42.5 49.5,42.5 48.75,43.25 v1(48.75,44.25)
  BOTTOM w0.3: S2.14 31.5,39.75 R65.1
485_TX: length 3
  TOP w0.2: R48.1 TH5.1
485_TXD: length 78.2
  TOP w0.2: U13.4 49.8,42.91 50,43.1 v1(50,43.25) 50.35,43.6 50.35,45.65 46.25,49.75 37.25,49.75 32.92,45.42 32.92,43.59 S2.13 ; v1(25.7,14.7) 25.34,14.35 25.25,14.35 23.9,13 U5.31
  BOTTOM w0.2: v1(50,43.25) 50.5,43.25 51,42.75 51,39 50.5,38.5 50.5,35.25 38.55,23.3 38.55,20.05 34.25,15.75 26.75,15.75 v1(25.7,14.7)
  BOTTOM w0.3: R67.1 31.54,42.25 S2.13
I2C_SCL: length 19.7
  TOP w0.2: U5.28 16.65,15.4 TH1.1 14.5,10.75 14.5,8.25 R55.1 13.75,6.75 13.25,6.25 13.25,5.5 13,5.25 U14.6
I2C_SDA: length 22.2
  TOP w0.2: U14.5 12.1,7.22 12,7.32 R56.1 12.55,7.5 12.75,7.7 12.75,10.88 11.63,12 TH2.1 10.75,12.25 11.5,13 13,13 16.2,16.2 U5.27
INT1: length 19
  TOP w0.2: U17.5 40.65,12.9 39.45,11.7 33.2,11.7 v1(32.75,11.25) ; v1(29.25,5.1) R52.1
  BOTTOM w0.2: v1(29.25,5.1) 28.98,5.37 28.98,8.48 31.75,11.25 v1(32.75,11.25)
INT1_M: length 10.7
  TOP w0.2: v1(39.5,15.25) U17.8 ; v1(37,13.25) 37,13.2 36.8,13 U5.10
  BOTTOM w0.2: v1(39.5,15.25) 38.5,15.25 37,13.75 v1(37,13.25)
INT2: length 19.2
  TOP w0.2: R53.1 v1(29.25,3.6) ; v1(32.75,12.25) 33.02,12.52 37.65,12.52 37.85,12.72 U17.4
  BOTTOM w0.2: v1(32.75,12.25) 31.75,12.25 28.05,8.55 28.05,4.8 v1(29.25,3.6)
INT2_M: length 8.2
  TOP w0.2: U17.1 37.3,15.25 37,15.55 37,15.75 36.5,16.25 35,16.25 32.55,13.8 U5.11
LED_GREEN: length 26.2
  TOP w0.2: U5.25 22,17.8 20.5,19.3 20.5,27 22,28.5 22,37 19.75,39.25 R44.1
LED_RED: length 33.2
  TOP w0.2: R38.1 12.5,41 13.5,40 18,40 21.25,36.75 21.25,28.54 20,27.29 20,19 22,17 U5.26
PLC1: length 13.3
  TOP w0.8: D16.1 41.8,32.55 43,33.75 R32.1
  TOP w1: D5.2 39.88,31.82 D16.1 39.81,32.55 39.36,33 39.36,34.64 37.15,36.85 37.15,37.35 TH4.1
PLC2: length 5.2
  TOP w1: D15.2 37.8,32.6 D17.1 37.65,34.25 36.65,35.25 TH3.1
PLC_RX: length 42.1
  TOP w0.2: U5.1 24.2,12.2 ; 24.2,12.2 24.2,12.6 25.5,13.9 25.9,13.9 v1(26.65,14.65) ; 24.2,12.2 U5.32 ; v1(49.25,33) 49,33.25 R33.1 48.5,34.25 47.75,35 Q9.3
  BOTTOM w0.2: v1(26.65,14.65) 27.25,15.25 34.5,15.25 39.15,19.9 39.15,23.15 48.65,32.65 48.9,32.65 v1(49.25,33)
PLC_TX: length 22.7
  TOP w0.2: R10.2 39.6,21.9 v1(39.9,21.6) ; v1(27.6,14.6) 26.4,13.4 25.65,13.4 25,12.75 U5.2
  BOTTOM w0.2: v1(27.6,14.6) 27.77,14.77 34.77,14.77 39.9,19.9 v1(39.9,21.6)
RESET: length 13.4
  TOP w0.2: U5.29 v1(21.5,14.6) 21.03,14.6 20.93,14.5 R42.1
  BOTTOM w0.2: v1(21.5,14.6) 23.6,14.6 25.6,16.6 25.6,21.59 J2.5
RX_ADC: length 16.3
  TOP w0.2: v1(24.7,17.5) 24.7,17.7 25,18 U5.23 ; v1(21,17) C11.2 R1.2 18.88,19.43 18.68,19.62 16.12,19.62 16.1,19.65 TP11.1 15.6,19.25 14.85,18.5 D1.1
  BOTTOM w0.2: v1(21,17) 23.38,17 23.88,17.5 v1(24.7,17.5)
RX_IN: length 4.8
  TOP w0.2: R15.1 R20.2 TP6.1
  TOP w0.3: TP6.1 J3.2
SCL: length 12.4
  TOP w0.2: U14.3 14.22,5.25 14,5.47 14,6 15.25,7.25 R57.1 16.5,7.63 16.87,8 22,8 22.5,7.5 U16.4
SDA: length 7.7
  TOP w0.2: U14.4 R58.1 16.5,5.12 16.75,4.87 18.54,4.87 18.55,4.88 19.98,4.88 20.6,5.5 U16.6
SELECT: length 40.4
  TOP w0.2: S2.9 31.45,52.5 30.5,52.5 27,49 27,33.25 24.5,30.75 24.5,26.75 23.5,25.75 23.5,21.75 24.5,20.75 25.5,20.75 25.8,20.45 U5.22
  BOTTOM w0.3: R75.1 31.45,52.5 S2.9
TX_OUT: length 3.6
  TOP w0.2: C13.1 TP8.1
  TOP w0.3: TP8.1 J3.1
TX_TRIG: length 60.6
  TOP w0.2: v1(29.5,12.6) 30,12.6 30.4,12.2 U5.9 ; R6.1 TP7.1 v1(2.25,43.5)
  BOTTOM w0.2: v1(2.25,43.5) 3.6,42.15 3.6,31.15 9.15,25.6 9.15,11.67 10.07,10.75 27.75,10.75 29.14,12.14 29.14,12.24 v1(29.5,12.6)
USM_ID4: length 34.8
  TOP w0.2: U5.14 32.23,16.2 32.5,16.47 32.5,20.25 33.75,21.5 33.75,29.25 29.75,33.25 29.75,43.94 30.58,44.77 S2.12
  BOTTOM w0.3: R69.1 31.54,44.75 S2.12
USM_ID5: length 53.2
  TOP w0.2: U5.24 24.2,20.23 23.96,20.46 22.54,20.46 21.47,21.53 21.47,25.8 23.5,27.82 23.5,31.75 26,34.25 26,50.5 29.5,54 33.25,54 33.75,53.5 33.75,49.5 S2.11
  BOTTOM w0.3: S2.11 31.5,47.25 R71.1
USM_ID6: length 36.5
  TOP w0.2: S2.10 30.58,49.85 28.5,47.77 28.5,33 25.5,30 25.5,26 26.25,25.25 26.25,21.75 28.2,19.8 U5.19
  BOTTOM w0.3: S2.10 31.46,49.75 R73.1
N00306: length 6
  TOP w0.2: U15.3 56,19.82 56.25,20.07 56.25,23.5 55.75,24 C55.1
N00430: length 3.6
  TOP w0.2: R10.1 40.5,24.15 41.2,23.45 Q8.1
N00485: length 3.6
  TOP w0.4: Q8.2 43.95,21.77 44.08,21.9 R8.2 R2.2
N00560: length 15.1
  TOP w0.3: 55.5,18.4 U15.1
  TOP w0.5: 55.75,15.5 56.25,15.5 56.25,18.4 55.75,18.4 ; 55.75,15.5 FB1.1 ; 55.75,15.5 55.75,18.4 ; FB1.1 55.12,15.5 ; FB1.1 55.5,17.12 ; 55.12,15.5 54.75,15.5 C39.1 54.75,17.12 55.12,17.12 ; 55.12,15.5 55.12,17.12 ; 55.5,17.12 55.12,17.12 ; 55.5,17.12 55.5,18.4 55.75,18.4
N00808: length 4.8
  TOP w0.2: 11.25,4.25 R51.1 10.25,3.75 10.75,3.25 C51.1 ; 11.25,4.25 U14.8 ; 11.25,4.25 11.25,4.5 11.5,4.75 U14.7
N00882: length 7.8
  TOP w0.6: U3.7 44.97,27.36 45.4,27.8 45.4,31.95 ; 45.4,31.95 R28.1 ; 45.4,31.95 R31.2
N16711905: length 1.9
  TOP w0.8: R32.2 44.62,35.75 Q9.1
N16712688: length 4.6
  TOP w0.2: U13.6 41.91,41.63 40.8,42.75 R43.1 R48.2
N16712703: length 4.2
  TOP w0.2: R45.2 40.75,40.37 ; 40.75,40.37 R49.2 ; 40.75,40.37 U13.7
N16713814: length 4.6
  TOP w0.2: J2.4 28.41,22.25 29.8,20.86 U5.17
N16714029: length 6.9
  TOP w0.2: J2.3 30.68,21.59 30.68,18.68 30,18 30,17.17 30.17,17 U5.15
N16714271: length 19.2
  TOP w0.3: Y4.2 41.2,5.65 41.2,9.2 C19.1 41.1,10.4 40.85,10.65 34.8,10.65 34.05,9.9 30.1,9.9 29.8,10.2 U5.8
N16714295: length 13.7
  TOP w0.3: Y4.1 35.7,5.65 C17.1 34.75,9.3 34.6,9.15 29.55,9.15 29,9.7 U5.7
N16714845: length 5
  TOP w0.2: U5.16 31.2,20.89 J2.2
N16717763: length 2.5
  TOP w0.2: R54.2 20.05,4 21.05,5 U16.7
N16718046: length 7
  TOP w0.2: R53.2 26.55,2.85 25.7,2 22.5,2 22,2.5 U16.9
N16718070: length 5.9
  TOP w0.2: R52.2 26.5,5.1 25.35,3.95 25.35,3 25.05,2.7 23.2,2.7 23,2.9 U16.11
N16718282: length 4.4
  TOP w0.2: U16.2 23.5,7.25 21.75,9 C52.1
N16724355: length 1.7
  TOP w0.25: R59.1 41.8,13.9 41.45,14.25 U17.6
N16729656: length 1.6
  BOTTOM w0.3: R60.2 25.36,34.61 S2.1
N16729712: length 1.6
  BOTTOM w0.3: R62.2 25.4,37.15 S2.2
N16729754: length 1.6
  BOTTOM w0.3: R64.2 25.44,39.69 S2.3
N16729796: length 1.6
  BOTTOM w0.3: R66.2 25.48,42.23 S2.4
N16732309: length 1.6
  BOTTOM w0.3: R68.2 25.48,44.77 S2.5
N16732331: length 1.6
  BOTTOM w0.3: R70.2 25.44,47.31 S2.6
N16732335: length 1.6
  BOTTOM w0.3: R72.2 25.4,49.85 S2.7
N16732375: length 1.6
  BOTTOM w0.3: R74.2 25.39,52.39 S2.8
N16777693: length 4
  TOP w0.2: Q4.1 3.95,39 R7.2 R6.2
N16777717: length 13.3
  TOP w0.2: 6,36 9.55,36 10.05,35.5 Q7.1 ; 6,36 6,39 R3.1 ; 6,36 6,34.83 Q1.1 ; 6,36 3.5,36 3,35.5 Q4.3
N16777760: length 7.6
  TOP w0.2: Q1.2 7.95,34.25 8.2,34 11.7,34 11.95,34.25 Q7.2 12.78,34.83 12.95,35 C13.2
N16777979: length 1.5
  TOP w0.2: C7.2 R15.2
N16777981: length 6.5
  TOP w0.2: U2.2 7.13,31.89 v1(7.25,32) R11.1 ; C7.1 v1(10.25,32)
  BOTTOM w0.2: v1(10.25,32) v1(7.25,32)
N16778000: length 9.5
  TOP w0.2: U2.3 5.87,29.25 5.37,28.75 R24.2 R22.2 4.09,27.25 4.59,26.75 U2.5
N16778063: length 8.5
  TOP w0.2: C8.1 6.37,27.25 5.87,26.75 U2.6 5.87,23 R13.1
N16778096: length 6.2
  TOP w0.2: R11.2 8.75,32.09 8.4,31.75 U2.1 8.4,30.25 TP9.1 R16.1
N16778098: length 1.5
  TOP w0.2: C8.2 R16.2
N16778104: length 5.3
  TOP w0.2: C9.2 TP10.1 R13.2 7.13,23 U2.7
N16778216: length 5.9
  TOP w0.2: D1.2 9.4,19.45 8.7,18.75 C9.1 D2.1
N16779077: length 7.9
  TOP w0.2: v1(13,44) 11.82,45.17 Q5.3 Q6.3
  BOTTOM w0.2: D9.2 v1(13,44)
N16779095: length 9.7
  TOP w0.2: Q5.2 11.95,43.5 11.45,44 6.55,44 6.05,43.5 Q6.1 6.05,41 R40.2
N16779267: length 2
  TOP w0.2: R38.2 10.05,41 Q5.1
N16779649: length 7
  TOP w0.2: Q10.3 Q3.3 20.07,45.17 v1(20.25,45)
  BOTTOM w0.2: D18.2 v1(20.25,45)
N16779651: length 9.7
  TOP w0.2: Q3.2 19.95,43.5 19.45,44 14.55,44 14.05,43.5 Q10.1 14.05,41 R46.2
N16779692: length 2
  TOP w0.2: R44.2 18.05,41 Q3.1
N16779821: length 3.7
  TOP w0.2: v1(45,44.25) 44.42,44.83 R41.1
  BOTTOM w0.2: v1(45,44.25) D14.1
N16779835: length 46.6
  BOTTOM w0.2: D10.1 42.55,13.35 43.32,14.12 43.32,21.02 52.2,29.9 52.2,42.8 49.8,45.2 48.45,45.2 47.5,44.25 47.5,40.45 46.5,39.45 D14.2
N16779837: length 27.9
  BOTTOM w0.2: D10.2 38.6,13 38.1,12.5 34.5,12.5 33,14 21.71,14 21.71,14 21.29,14 21.29,14 20,14 19.1,14.9 14.9,14.9 14.35,15.45 D19.1
N16779852: length 27.5
  BOTTOM w0.2: D19.2 13,21.25 15.15,23.4 15.15,32.5 15.45,32.8 D18.1
N16779961: length 4
  TOP w0.2: v1(38,45.47) 38,46 38.5,46.5 R37.1
  BOTTOM w0.2: D6.1 38.47,45 v1(38,45.47)
N16779980: length 40.6
  BOTTOM w0.2: D6.2 45.25,45 47,46.75 49.45,46.75 53,43.2 53,29.7 45,21.7 D7.1
N16779982: length 31.1
  BOTTOM w0.2: D7.2 45,12 44.25,11.25 34.75,11.25 32.75,13.25 19.65,13.25 19.4,13 D8.1
N16779984: length 31.4
  BOTTOM w0.2: D8.2 14.47,13 13.97,13.5 12.96,13.5 12.96,13.5 12.54,13.5 12.54,13.5 11.4,13.5 10.8,14.1 10.8,21.9 13,24.1 D9.1
N167777270: length 2.1
  TOP w0.2: R25.1 11.75,38.6 11,37.85 Q7.3

## Copper pours and planes (outline as drawn; the poured copper is in the pictures)
GND on TOP: 7.21,0.5 0.5,7.21 0.5,50.79 7.21,57.5 50.79,57.5 57.5,50.79 57.5,7.21 50.79,0.5 ; 25 cut-outs
GND on BOTTOM: 7.21,0.5 0.5,7.21 0.5,50.79 7.21,57.5 50.79,57.5 57.5,50.79 57.5,7.21 50.79,0.5 ; 12 cut-outs

## Text on the board
Ref Des/Silkscreen Top: PLC1 | PLC2 | 485Tx | 485Rx | USM BOARD REV.P1
User.19: FIGURE | SIZE | 0.30 | 0.40 | 0.80 | 0.90 | 1.00 | 3.20 | DRILL CHART: TOP to BOTTOM | ALL UNITS ARE IN MILLIMETERS | PLATED | QTY | 297 | 7 | 3 | 11 | 6 | 16 | 5
